# Altium PCB Badge.PcbDoc
Units mil, origin at the board's own origin, x right, y up, seen from the top; angles counter-clockwise.
Board outline 2068 x 3859.51 mil, 2 copper layers (Top Layer, Bottom Layer); 47 components, 61 nets, 170 pads, 40 vias.
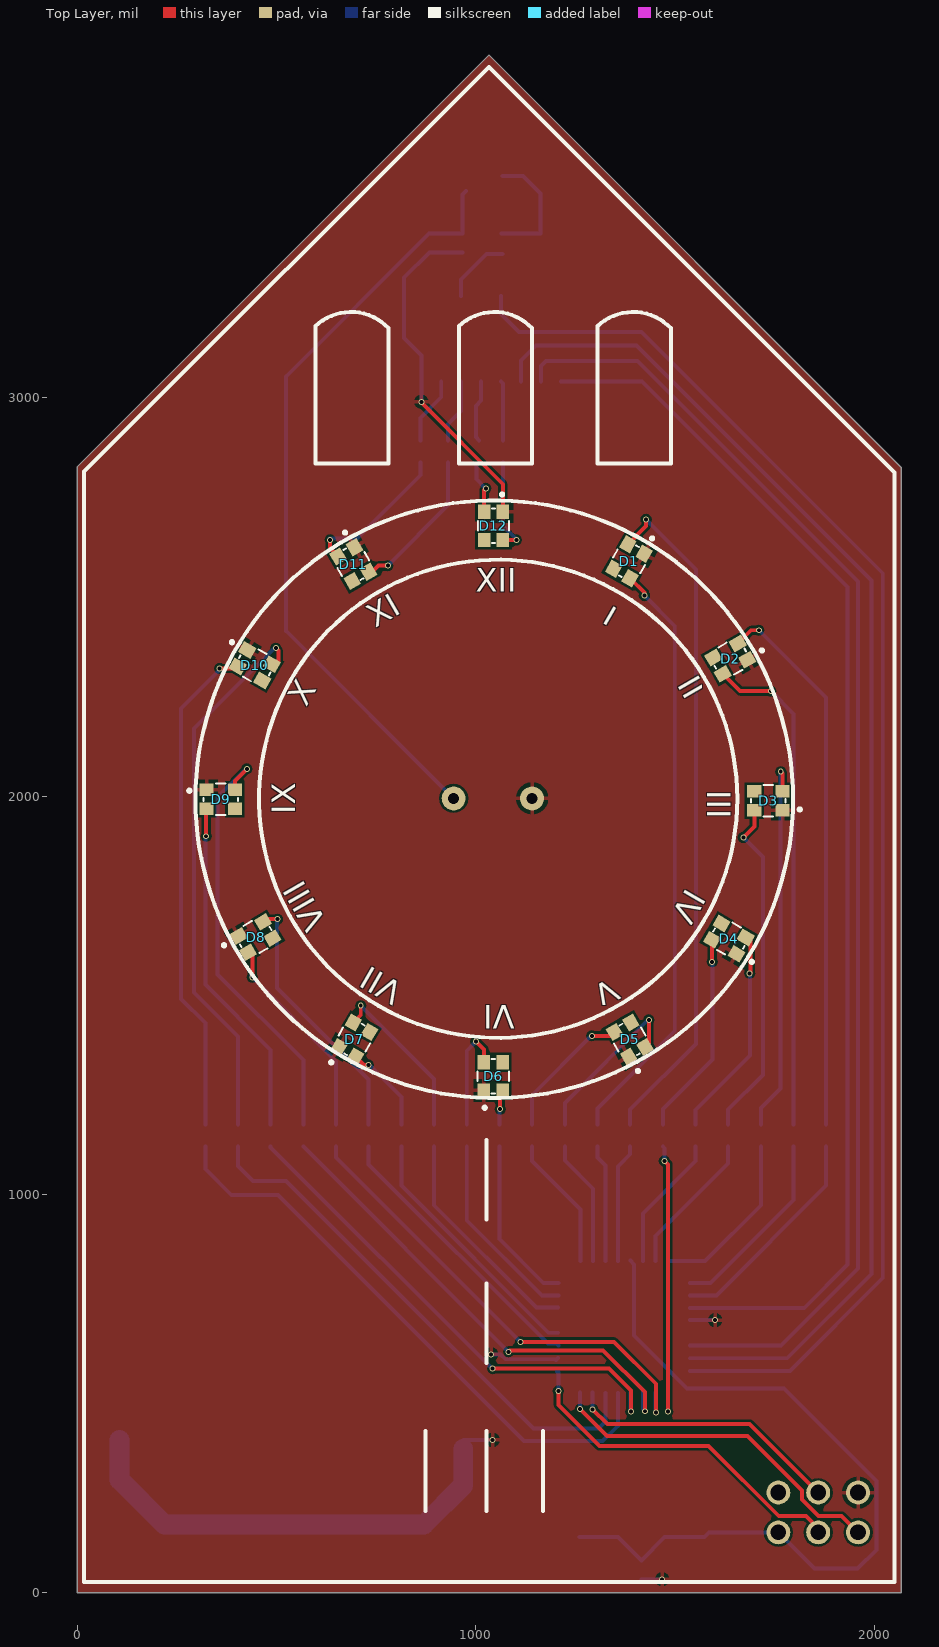
[diagram p0: Top Layer view]
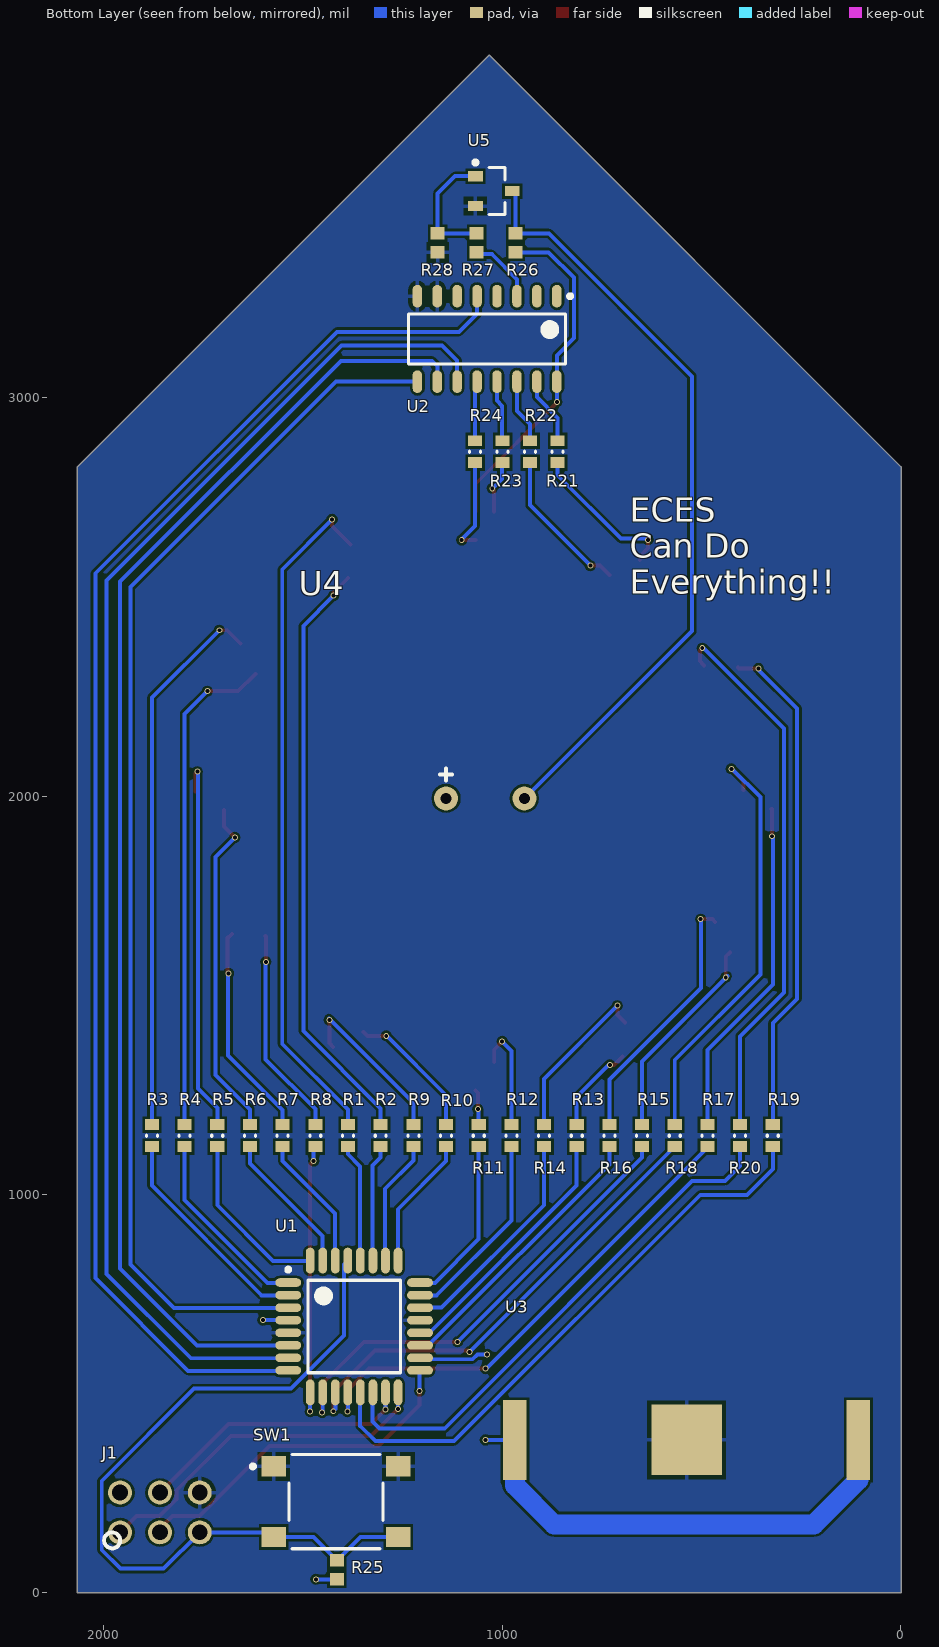
[diagram p1: Bottom Layer view, seen from below]

## Layer stack, top to bottom
Top Solder: solder mask 0.4, Solder Resist, Dk 3.5
Top Layer: signal copper 1.4
Dielectric 1: dielectric 12.6, FR-4, Dk 4.8
Bottom Layer: signal copper 1.4
Bottom Solder: solder mask 0.4, Solder Resist, Dk 3.5

## Board outline
-1,0 -1,2826.02 1032.49,3859.51 2067,2825 2067,0

## Design rules (kind name [scope] priority, off if disabled: settings)
Clearance [All] p1: gap=6 ignorepadtopadclearanceinfootprint=FALSE except(0: Arc-Text Arc-Hole Track-Text Track-Hole SMDPad-Text SMDPad-Hole THPad-Text THPad-Hole Via-Text Via-Hole Fill-Text Fill-Hole Poly-Text Poly-Hole Region-Text Region-Hole Text-Text Text-Hole)
MinimumSolderMaskSliver [All] p1: minsoldermaskwidth=4
PolygonConnect [All] p1: connectstyle=Relief reliefconductorwidth=10 reliefentries=4 polygonreliefangle="90 Angle" airgapwidth=10
RoutingVias [All] p1: holewidth=28 width=50 viastyle="Through Hole" minholewidth=28 minwidth=50 maxholewidth=28 maxwidth=50
SilkToSilkClearance [All] p1: silktosilkclearance=0
SilkToSolderMaskClearance [IsPad] p1: minsilkscreentomaskgap=0 clearancetoexposedcopper=TRUE
SolderMaskExpansion [All] p1: expansion=2
Width [All] p1: maxlimit=100 minlimit=10 preferedwidth=10
27 further rules are at their usual default settings.

## Components (designator, comment, footprint, x,y, rotation, side; value= is the part's Value field where it differs from the comment)
D1 "White LED" *LED_ASMB-KTF0-0A306 1384,2589 r240 top
D2 "White LED" *LED_ASMB-KTF0-0A306 1638.5,2344.74 r210 top
D3 "White LED" *LED_ASMB-KTF0-0A306 1734,1988 r180 top
D4 "White LED" *LED_ASMB-KTF0-0A306 1635,1642 r150 top
D5 "White LED" *LED_ASMB-KTF0-0A306 1386,1389 r120 top
D6 "White LED" *LED_ASMB-KTF0-0A306 1043.62,1296.43 r90 top
D7 "White LED" *LED_ASMB-KTF0-0A306 695,1389 r60 top
D8 "White LED" *LED_ASMB-KTF0-0A306 447,1646 r30 top
D9 "White LED" *LED_ASMB-KTF0-0A306 359.57,1991.62 r0 top
D10 "White LED" *LED_ASMB-KTF0-0A306 445,2328 r330 top
D11 "White LED" *LED_ASMB-KTF0-0A306 692.26,2582 r300 top
D12 "White LED" *LED_ASMB-KTF0-0A306 1044,2678 r270 top
J1 "ICSP Header" "programmer header" 1859,202 r90 bottom
R1 "603" RESC0603(1608)_L 1387,1147.56 r90 bottom value="330.00 Ohm"
R2 "603" RESC0603(1608)_L 1305,1147.56 r90 bottom value="330.00 Ohm"
R3 "603" RESC0603(1608)_L 1879,1147.56 r90 bottom value="330.00 Ohm"
R4 "603" RESC0603(1608)_L 1797,1147.56 r90 bottom value="330.00 Ohm"
R5 "603" RESC0603(1608)_L 1715,1147.56 r90 bottom value="330.00 Ohm"
R6 "603" RESC0603(1608)_L 1633,1147.56 r90 bottom value="330.00 Ohm"
R7 "603" RESC0603(1608)_L 1551,1147.56 r90 bottom value="330.00 Ohm"
R8 "603" RESC0603(1608)_L 1469,1147.56 r90 bottom value="330.00 Ohm"
R9 "603" RESC0603(1608)_L 1223,1147.56 r90 bottom value="330.00 Ohm"
R10 "603" RESC0603(1608)_L 1141,1147.56 r90 bottom value="330.00 Ohm"
R11 "603" RESC0603(1608)_L 1059,1147.56 r90 bottom value="330.00 Ohm"
R12 "603" RESC0603(1608)_L 977,1147.56 r90 bottom value="330.00 Ohm"
R13 "603" RESC0603(1608)_L 813,1147.56 r90 bottom value="330.00 Ohm"
R14 "603" RESC0603(1608)_L 895,1147.56 r90 bottom value="330.00 Ohm"
R15 "603" RESC0603(1608)_L 649,1147.56 r90 bottom value="330.00 Ohm"
R16 "603" RESC0603(1608)_L 731,1147.56 r90 bottom value="330.00 Ohm"
R17 "603" RESC0603(1608)_L 485,1147.56 r90 bottom value="330.00 Ohm"
R18 "603" RESC0603(1608)_L 567,1147.56 r90 bottom value="330.00 Ohm"
R19 "603" RESC0603(1608)_L 321,1147.56 r90 bottom value="330.00 Ohm"
R20 "603" RESC0603(1608)_L 403,1147.56 r90 bottom value="330.00 Ohm"
R21 "603" RESC0603(1608)_L 861,2864 r270 bottom value="330.00 Ohm"
R22 "603" RESC0603(1608)_L 930,2864 r270 bottom value="330.00 Ohm"
R23 "603" RESC0603(1608)_L 999,2864 r270 bottom value="330.00 Ohm"
R24 "603" RESC0603(1608)_L 1068,2864 r270 bottom value="330.00 Ohm"
R25 "603" RESC1608X50X30LL20T20 1415,58 r270 bottom
R26 "603" RESC1608X50X30LL20T20 966.59,3388.13 r90 bottom
R27 "603" RESC1608X50X30LL20T20 1064.3,3388.13 r270 bottom
R28 "603" RESC1608X50X30LL20T20 1162,3388.13 r270 bottom
SW1 "SW" CKCP-PTS645S_V 1417,229 r180 bottom
U1 "ATtiny48-AUR" 32A_N 1371.65,668.75 r180 bottom
U2 "Multiplexer 3:8" Multiplexer 1038,3147 r270 bottom
U3 "Coin Cell" Batt 537.1,384 r180 bottom
U4 "Piezo" Piezo 1141,1994 r180 bottom
U5 "N-Type Mosfet" 2N7002K-7 1021,3518 r180 bottom

## Footprints (in the part's own frame and the unit in brackets; to place one, negate y for a bottom-side part, rotate by r counter-clockwise, add the part's x,y. Pads: shape width x height; smd on the part's side, far side on the other; paste and mask are expansions set on the pad)
2N7002K-7 [mm] "SOT23, 3-Leads, Body 2.90x2.40mm, Pitch 0.95mm, IPC Medium Density"
  rect 0.95x0.65 smd: D(1.175,0) G(-1.175,0.95) S(-1.175,-0.95)
  silkscreen extent -1.3,-1.5 0.7,1.95, body extent -1.25,-1.5 1.25,1.5, height 1.1
32A_N [mm] "Thin QFP, 32-Leads, Body 7x7mm, Pitch 0.8mm, IPC Medium Density"
  oval 1.65x0.55 smd: 1(-4.2,2.8) 2(-4.2,2) 3(-4.2,1.2) 4(-4.2,0.4) 5(-4.2,-0.4) 6(-4.2,-1.2) 7(-4.2,-2) 8(-4.2,-2.8) 17(4.2,-2.8) 18(4.2,-2) 19(4.2,-1.2) 20(4.2,-0.4) 21(4.2,0.4) 22(4.2,1.2) 23(4.2,2) 24(4.2,2.8)
  oval 0.55x1.65 smd: 9(-2.8,-4.2) 10(-2,-4.2) 11(-1.2,-4.2) 12(-0.4,-4.2) 13(0.4,-4.2) 14(1.2,-4.2) 15(2,-4.2) 16(2.8,-4.2) 25(2.8,4.2) 26(2,4.2) 27(1.2,4.2) 28(0.4,4.2) 29(-0.4,4.2) 30(-1.2,4.2) 31(-2,4.2) 32(-2.8,4.2)
  silkscreen extent -4.33,-2.95 2.95,3.75, body extent -3.5,-3.5 3.5,3.5, height 1.2
*LED_ASMB-KTF0-0A306 [mm]
  rect 0.9x0.8 smd: 1(-0.9,0.6) 2(-0.9,-0.6) 3(0.9,-0.6) 4(0.9,0.6)
  silkscreen extent -2.1,-1 1.1,1
Batt [mm] "Coin Cell"
  rect 4.5x4.5 smd: GND(0,0)
  rect 1.5x5.1 smd: VDD(-10.95,0) VDD(10.95,0)
  body extent -11.81,-7.75 11.81,7.37, height 0.25
CKCP-PTS645S_V [mm] "THD, 4-Leads, Body 6x6mm, Pitch 4.5mm"
  rect 1.55x1.3 smd: 1(-3.975,2.25) 2(3.975,2.25) 3(-3.975,-2.25) 4(3.975,-2.25)
  silkscreen extent -5.43,-3 3,3, body extent -4.5,-3 4.5,3, height 4.3
Multiplexer [mm] "SOP, 16-Leads, Body 9.90x3.90mm, Pitch 1.27mm, IPC Medium Density"
  oval 1.45x0.6 smd: 1(-2.725,4.445) 2(-2.725,3.175) 3(-2.725,1.905) 4(-2.725,0.635) 5(-2.725,-0.635) 6(-2.725,-1.905) 7(-2.725,-3.175) 8(-2.725,-4.445) 9(2.725,-4.445) 10(2.725,-3.175) 11(2.725,-1.905) 12(2.725,-0.635) 13(2.725,0.635) 14(2.725,1.905) 15(2.725,3.175) 16(2.725,4.445)
  silkscreen extent -2.85,-5 1.6,5.42, body extent -3,-5 3,5, height 1.75
Piezo [mil]
  round 60 hole 27.56: 1(0,0) 2(196.85,0)
  silkscreen extent -15,45 15,75, body extent -380,-480 580,480, height 256
"programmer header" [mil]
  round 60 hole 39.37: 1(-50,100) 2(50,100) 3(-50,0) 4(50,0) 5(-50,-100) 6(50,-100)
  silkscreen extent -90,100 -50,140, body extent -100,-150 100,150, height 330
RESC0603(1608)_L [mm] "Chip Resistor, Body 1.6x0.8mm, IPC High Density"
  rect 0.7x0.9 smd: 1(-0.7,0) 2(0.7,0)
  silkscreen extent -0.05,-0.35 0.05,0.35, body extent -0.85,-0.47 0.85,0.47, height 0.6
RESC1608X50X30LL20T20 [mm] "Chip Resistor, 2-Leads, Body 1.60x0.80mm, IPC High Density"
  rect 0.8x0.9 smd: 1(-0.6,0) 2(0.6,0)
  body extent -0.9,-0.5 0.9,0.5, height 0.5

## Part data
D1 D2 D3 D4 D5 D6 D7 D8 D9 D10 D11 D12: library part ASMB-KTF0-0A306, "2220 Tricolor PLCC4 Surface Mount LED", Package="PLCC-4 Broadcom", Digi-Key_Part_Number=516-3906-1-ND, Digi-Key_Purchase_URL=https://www.digikey.com/product-detail/en/broadcom-limited/ASMB-KTF0-0A306/516-3906-1-ND/7917025?utm_source=snapeda&utm_medium=aggregator&utm_campaign=symbol, MF="Broadcom Limited", MP=ASMB-KTF0-0A306, SnapEDA_Link=https://www.snapeda.com/parts/ASMB-KTF0-0A306/Broadcom%20Limited/view-part/?ref=snap
R1 R2 R3 R4 R5 R6 R7 R8 R9 R10 R11 R12 R13 R14 R15 R16 R17 R18 R19 R20 R21 R22 R23 R24: library part CMP-1012-00062-1, "330R 0.1W 5% 0603 (1608 Metric)  SMD", Case-EIA=0603, Case-Metric=1608, Manufacturer=Susumu, MPN=RR0816P-331-D, Power="0.1 W", Tolerance="5 %", Technology=SMT
R25 R26 R27 R28: library part CMP-2000-02424-1, Manufacturer=Susumu, MPN=RR0816P-103-D
SW1: library part CMP-2000-07594-1, "Tact Switch, SPST-NO, 50 mA, -20 to 60 degC, 4-Pin SMD, RoHS, Tape and Reel", Case\/Package=SMD/SMT, Colour=Black, Contact Resistance=100mOhm, Current Rating=50mA, Manufacturer="C&K Components", Max Operating Temperature=60degC, Max Voltage Rating (DC)=12V, Min Operating Temperature=-20degC, MPN=PTS645S, Operating Force=160gf, Package Description="4-Pin Surface Mount Device, Body 6 x 6 mm, Pitch 4.5 mm", Package Quantity=1000, Actuator Length=0.85mm, Actuator Material=Polyamide, Contact Material=Silver, Contact Plating=Silver, Datasheet URL=http://www.ckswitches.com/media/1471/pts645.pdf, Datasheet Version=04/2016, Depth=9mm, Illumination Type=Illuminated, Lead Free=LeadFree, Length=6mm, Manufacturer URL=http://www.ckswitches.com/, Max Current Rating=50mA, Mechanical Life=100000Cycles, Mount=SurfaceMount, Mounting Technology=SurfaceMount, Orientation=Straight, Packaging=TapeandReel, REACH SVHC=NoSVHC, RoHSCompliant=True, Switch Function=Off-Mom, Termination=GullWing, Throw Configuration=SPST, Voltage Rating (DC)=12V
U1: library part CMP-0093-00123-1, "8-bit AVR Microcontroller, 1.8-5.5V, 4KB Flash, 64 Bytes EEPROM, 256 Bytes SRAM, 32-pin TQFP, Industrial Grade (-40°C to 85°C), Pb-Free, Reel", Code_JEDEC=MS-026-ABA, DatasheetVersion="revC, Mar-2009", PackageDescription="32-Lead, 7x7x1.0 mm Body, 0.8mm Lead Pitch, Thin Profile Plastic Quad Flat Package (TQFP)", PackageReference=32A, PackageVersion="revB, Oct-2001"
U2: library part Multiplexer, "IC LV FET MUX/DEMUX 16-TSSOP", Manufacturer=TI, MPN=SN74CBTLV3251PWR
U3: library part Batt, "Battery Retainer Coin, 20.0mm 1 Cell SMD (SMT) Tab", Manufacturer="Keystone Electronics", MPN=3034TR
U4: "AUDIO PIEZO TRANSDUCER 30V TH", Manufacturer="TDK Corporation", MPN=PS1240P02BT
U5: library part 2N7002K-7, "N-Channel 800V 1A (Tc) 45W (Tc) Surface Mount D-Pak", Manufacturer="Diodes Incorporated", MPN=2N7002K-7

## Via types
v1: diameter 15, hole 10, Top Layer to Bottom Layer, tented both sides, 40 vias

## Nets (pads, with @x,y where several pads share a name; then routed paths per layer and width w, separated by ;. In a path a pad name is that pad's centre, name@x,y a point inside that pad or via, vN(x,y) a via of type N, cw(c..) or ccw(c..) an arc to the next point about the centre after c; other vN are vias at no path point)
A: U1.8 U2.5 | length 3620.5
  Bottom Layer w10: U2.5 1063,3210 1108,3165 1415,3165 2021,2559 2021,790 1788.52,557.52 U1.8@1537.71,557.52
GND: J1.6 R28.2 SW1.1 SW1.2 U1.5 U1.21 U2.7 U2.8 U3.GND U5.S
LED1_B: R2.1 U1.27 | length 295.2
  Bottom Layer w10: R2.1 1305,1093 1325.11,1072.89 U1.27@1325.11,833.11
LED1_R: R1.1 U1.28 | length 299.5
  Bottom Layer w10: U1.28@1356.61,833.11 1356.61,1070.61 1387,1101 R1.1
LED2_B: R4.1 U1.1 | length 479.5
  Bottom Layer w10: U1.1@1537.71,777.99 1588.99,777.99 1797,986 R4.1
LED2_R: R3.1 U1.2 | length 553.4
  Bottom Layer w10: U1.2@1537.71,746.5 1603.5,746.5 1879,1022 R3.1
LED3_B: R6.1 U1.31 | length 362.2
  Bottom Layer w10: U1.31@1451.09,833.11 1451.09,896.09 1633,1078 R6.1
LED3_R: R5.1 U1.32 | length 437.4
  Bottom Layer w10: U1.32@1482.59,833.11 1575.11,833.11 1715,973 R5.1
LED4_B: R8.1 U1.9 | length 718.5
  Top Layer w10: v1(1473,1084) 1481.88,1075.12 v1(1481.88,455.12)
  Bottom Layer w10: R8.1 1473,1116 v1(1473,1084) ; v1(1481.88,455.12) U1.9
LED4_R: R7.1 U1.30 | length 341.3
  Bottom Layer w10: U1.30@1419.6,833.11 1419.6,952.6 1551,1084 R7.1
LED5_B: R10.1 U1.25 | length 337.1
  Bottom Layer w10: R10.1 1141,1084 1262.12,962.88 U1.25@1262.12,833.11
LED5_R: R9.1 U1.26 | length 316.1
  Bottom Layer w10: R9.1 1223,1085 1293.61,1014.39 U1.26@1293.61,833.11
LED6_B: R12.1 U1.23 | length 493.1
  Bottom Layer w10: R12.1 977,935 1165.5,746.5 U1.23@1207,746.5
LED6_R: R11.1 U1.24 | length 425.6
  Bottom Layer w10: R11.1 1059,888 1169.01,777.99 U1.24@1207,777.99
LED7_B: R14.1 U1.22 | length 564.7
  Bottom Layer w10: R14.1 895,973 1152.01,715.99 U1.22
LED7_R: R13.1 U1.20 | length 644.1
  Bottom Layer w10: R13.1 813,1022 1182,653 U1.20
LED8_B: R16.1 U1.19 | length 709
  Bottom Layer w10: R16.1 731,1075.49 1180.99,625.5 1202.02,625.5 U1.19@1207,620.51
LED8_R: R15.1 U1.10 | length 1188.3
  Top Layer w10: v1(1112,630) 1347,630 1452,525 v1(1452,453)
  Bottom Layer w10: R15.1 649,1093 v1(1112,630) ; U1.10 1450.39,454.61 v1(1452,453)
LED9_B: R18.1 U1.11 | length 1212.6
  Top Layer w10: v1(1082,605) 1085.51,608.51 1319.49,608.51 1424,504 v1(1424,456)
  Bottom Layer w10: R18.1 v1(1082,605) ; U1.11 1418.89,461.11 v1(1424,456)
LED9_R: R17.1 U1.12 | length 1260.4
  Top Layer w10: v1(1042,563) 1334,563 1388.74,508.26 v1(1388.74,455.12)
  Bottom Layer w10: R17.1 485,1117.84 1039.84,563 v1(1042,563) ; U1.12 1387.39,456.47 v1(1388.74,455.12)
LED10_B: R20.1 U1.14 | length 1322.5
  Bottom Layer w10: R20.1 403,1072 441,1034 523.22,1034 1144.22,413 1308,413 1325.11,430.11 U1.14@1325.11,502.4
LED10_R: R19.1 U1.13 | length 1473.3
  Bottom Layer w10: R19.1 321,1064 386,999 503,999 1121,381 1318,381 1356.61,419.61 U1.13@1356.61,502.4
LED11_B: R22.1 U2.14 | length 161.8
  Bottom Layer w10: R22.1 930,2933 963,2966 U2.14
LED11_R: R21.1 U2.15 | length 169.7
  Bottom Layer w10: R21.1 861,2949 913,3001 U2.15
LED12_B: R24.1 U2.12 | length 150.2
  Bottom Layer w10: U2.12 1068,3034.72 R24.1
LED12_R: R23.1 U2.13 | length 155.9
  Bottom Layer w10: R23.1@1008,2892.56 1000,2900.56 1000,2979 1013,2992 U2.13
MISO: J1.1 U1.16 | length 880.6
  Top Layer w10: v1(1261.41,461.41) 1328.82,394 1681,394 1818,257 1818,235.02 1860.02,193 1918,193 J1.1
  Bottom Layer w10: v1(1261.41,461.41) U1.16
MOSI: J1.4 U1.15 | length 695.1
  Top Layer w10: v1(1292.91,460.91) 1329.81,424 1687,424 J1.4
  Bottom Layer w10: v1(1292.91,460.91) U1.15
NetD1_2: D1.2 R1.2 | length 1720.5
  Top Layer w10: D1.2 1427,2677.24 v1(1427,2694)
  Bottom Layer w10: R1.2 1387,1213 1552,1378 1552,2569 v1(1427,2694)
NetD1_4: D1.4 R2.2 | length 1498.2
  Top Layer w10: D1.4 1423,2510.24 v1(1423,2503)
  Bottom Layer w10: R2.2 1305,1216 1499,1410 1499,2427 v1(1423,2503)
NetD2_2: D2.2 R3.2 | length 1377.2
  Top Layer w10: D2.2 1690.46,2416 v1(1710,2416)
  Bottom Layer w10: v1(1710,2416) 1879,2247 R3.2
NetD2_4: D2.4 R4.2 | length 1249.9
  Top Layer w10: D2.4 1663.19,2263 v1(1740,2263)
  Bottom Layer w10: v1(1740,2263) 1797,2206 R4.2
NetD3_2: D3.2 R5.2 | length 956.4
  Top Layer w10: v1(1765,2061) 1769.43,2056.57 D3.2
  Bottom Layer w10: R5.2 1715,1217 1764,1266 v1@1764,2060
NetD3_4: D3.4 R6.2 | length 857
  Top Layer w10: v1(1671,1896) 1698.57,1923.57 D3.4
  Bottom Layer w10: R6.2 1633,1213 1720,1300 1720,1847 v1(1671,1896)
NetD4_2: D4.2 R7.2 | length 541.9
  Top Layer w10: D4.2@1678.5,1653.74 1687,1645.24 1689.09,1645.24 1689.09,1557.09 v1(1687,1555)
  Bottom Layer w10: R7.2 1551,1212 1688,1349 v1@1688,1555
NetD4_4: D4.4 R8.2 | length 521.1
  Top Layer w10: v1(1593,1584) 1593,1647.76 D4.4@1593.5,1648.26
  Bottom Layer w10: R8.2 1469,1214 1594,1339 v1@1594,1580
NetD5_2: D5.2 R9.2 | length 426.6
  Top Layer w10: D5.2 1434,1379.95 v1(1434,1438)
  Bottom Layer w10: R9.2 1223,1230 v1@1435,1442
NetD5_4: D5.4 R10.2 | length 342.7
  Top Layer w10: v1(1291,1398) 1337.95,1398 D5.4
  Bottom Layer w10: R10.2 1141,1249 v1@1288,1396
NetD6_2: D6.2 R11.2 | length 87.5
  Top Layer w10: v1(1061,1214) 1061,1254.76 D6.2
  Bottom Layer w10: R11.2 v1@1059,1213
NetD6_4: D6.4 R12.2 | length 275
  Top Layer w10: v1(1000,1384) 1020,1364 D6.4
  Bottom Layer w10: R12.2 977,1360 v1@998,1381
NetD7_2: D7.2 R13.2 | length 227
  Top Layer w10: D7.2 719.24,1325 v1(730,1325)
  Bottom Layer w10: v1@731,1327 813,1245 R13.2
NetD7_4: D7.4 R14.2 | length 422.5
  Top Layer w10: D7.4 711,1450.24 v1(711,1474)
  Bottom Layer w10: v1@713,1472 895,1290 R14.2
NetD8_2: D8.2 R15.2 | length 528.9
  Top Layer w10: D8.2 439,1596.95 v1(439,1545)
  Bottom Layer w10: v1@435,1548 649,1334 R15.2
NetD8_4: D8.4 R16.2 | length 649.1
  Top Layer w10: D8.4 472.7,1691 v1(502,1691)
  Bottom Layer w10: v1@501,1690 501,1518 731,1288 R16.2
NetD9_2: D9.2 R17.2 | length 856.3
  Top Layer w10: v1(323,1899) 323,1966.87 D9.2
  Bottom Layer w10: v1@321,1894 321,1527 485,1363 R17.2
NetD9_4: D9.4 R18.2 | length 1075.1
  Top Layer w10: D9.4 395,2038 v1(425,2068)
  Bottom Layer w10: v1@422,2067 352,1997 352,1552 567,1337 R18.2
NetD10_2: D10.2 R19.2 | length 1255.5
  Top Layer w10: v1(357,2320) 406.24,2320 D10.2@408.5,2322.26
  Bottom Layer w10: R19.2 321,1430 260,1491 260,2220 v1@354,2314
NetD10_4: D10.4 R20.2 | length 1376.2
  Top Layer w10: D10.4@493.5,2327.74 504,2338.24 504,2365 v1(498,2371)
  Bottom Layer w10: R20.2 403,1397 293,1507 293,2170 v1@495,2372
NetD11_2: D11.2 R21.2 | length 386.1
  Top Layer w10: v1(634,2643) 634,2622.5 654.83,2601.67 D11.2@654.83,2591.88
  Bottom Layer w10: v1@632,2646 702,2646 861,2805 R21.2
NetD11_4: D11.4 R22.2 | length 377.7
  Top Layer w10: D11.4@731.17,2554.12 755.05,2578 v1(779,2578)
  Bottom Layer w10: v1@779,2579 930,2730 R22.2
NetD12_2: D12.2 R23.2 | length 136.9
  Top Layer w10: D12.2 1020.38,2767.38 v1(1025,2772)
  Bottom Layer w10: R23.2@1008,2837.44 1001,2830.44 1001,2795 v1@1023,2773
NetD12_4: D12.4 R24.2 | length 237.6
  Top Layer w10: D12.4 v1(1101.57,2642.57)
  Bottom Layer w10: R24.2 1068,2678 v1@1100,2646
NetR26_2: R26.2 U4.2 U5.D | length 1933.8
  Bottom Layer w10: U4.2 524,2414.15 524,3053 882.76,3411.76 R26.2 966.59,3509.85 U5.D
NetR27_1: R27.1 R28.1 U5.G | length 310.7
  Bottom Layer w10: R27.1 R28.1 1162,3512 1118.6,3555.4 U5.G
Piezo: R27.2 U2.3 | length 172.3
  Bottom Layer w10: U2.3 963,3296.41 1026.22,3359.63 R27.2@1066.94,3359.63
PP_CC: D1.1 D2.1 D3.1 D4.1 D5.1 D6.1 D7.1 D8.1 D9.1 D10.1 D11.1 D12.1 J1.2 R25.2 R26.1 U1.4 U1.18 U2.16 U3.VDD U4.1 | length 2391.9
  Top Layer w10: v1(863,2989) 863,2987 1067.62,2782.38 D12.1
  Bottom Layer w10: v1(863,2989) U2.16 863,3106 820,3149 820,3301 883.51,3364.51 R26.1 ; U3.VDD@968.2,361.06 968.2,384 v1(1042,384) ; v1(1038,599) 1061.84,599 1074.34,586.5 1199.78,586.5 1201.28,585 U1.18 ; R25.2 v1(1467.38,34.38) ; U1.4 v1(1600.5,684.5)
  Bottom Layer w50: U3.VDD@106,384 106,284 218,172 870,172 968.2,270.2 U3.VDD@968.2,361.06
RESET: J1.5 R25.1 SW1.3 SW1.4 U1.29 | length 1979.4
  Bottom Layer w10: SW1.4 1356.2,140.42 R25.1 1473.8,140.42 SW1.3 1585.08,152 J1.5 1850,61 1958,61 2005,108 2005,281 1773,513 1529.99,513 1397.06,645.93 1397.06,824.43 U1.29
S0: U1.7 U2.11 | length 3476.5
  Bottom Layer w10: U2.11 1113,3093 1151,3131 1403,3131 1993,2541 1993,801 1781.02,589.02 U1.7@1537.71,589.02
S1: U1.6 U2.10 | length 3295.6
  Bottom Layer w10: U2.10 1163,3079 1176,3092 1405,3092 1959,2538 1959,814 1765.51,620.51 U1.6@1537.71,620.51
S2: U1.3 U2.9 | length 3074.1
  Bottom Layer w10: U2.9 1417.28,3039.72 1933,2524 1933,824 1824,715 U1.3@1537.71,715
SCK: J1.3 U1.17 | length 879.3
  Top Layer w10: v1(1207,507) 1207,472 1310,369 1584.02,369 1760.02,193 1828,193 1859,162 J1.3
  Bottom Layer w10: U1.17 1203.78,556 1207,552.78 v1(1207,507)
pads on no net: D1.3 D2.3 D3.3 D4.3 D5.3 D6.3 D7.3 D8.3 D9.3 D10.3 D11.3 D12.3 U2.1 U2.2 U2.4 U2.6

## Polygon pours and split planes (outlines as drawn)
GND on Bottom Layer "GND_L02_P000" (solid, remove dead copper, pour order 0): -1,0 -1,2826.02 1032.49,3859.51 2067,2825 2067,0
PP_CC on Top Layer "PP_CC_L01_P001" (solid, remove dead copper, pour order 1): -1,0 -1,2826.02 1032.49,3859.51 2067,2825 2067,0

## Silkscreen, mask and mechanical layers (free items; w line width, h text height)
Top Overlay:
  circle w10: c1056,1993 r600
  circle w10: c1046,1992 r750
  lines w10: 17,28 2051,28 2051,2812 1033,3830 17,2814 17,30 ; 597,3176 597,2835 781,2835 781,3171 ; 597,3179 cw(c686.5,3084.5) 781,3174 ; 873,206 873,406 ; 957,3176 957,2835 1141,2835 1141,3171 ; 957,3179 cw(c1046.5,3084.5) 1141,3174 ; 1026,206 1026,406 ; 1027,577 1027,777 ; 1027,937 1027,1137 ; 1168,206 1168,406 ; 1305,3176 1305,2835 1489,2835 1489,3171 ; 1305,3179 cw(c1394.5,3084.5) 1489,3174
  text "XII" at 1000,2492 h100
  text "I" at 1304,2420 h100 r330
  text "XI" at 758,2403 h100 r30
  text "II" at 1486,2269 h100 r300
  text "X" at 592,2212 h100 r60
  text "III" at 1561,2015 h100 r270
  text "IX" at 567,1954 h100 r90
  text "IV" at 1511,1781 h100 r240
  text "VIII" at 645,1693 h100 r120
  text "V" at 1327,1562 h100 r210
  text "VII" at 832,1541 h100 r150
  text "VI" at 1098,1495 h100 r180
Bottom Overlay:
  text "ECES / Can Do  / Everything!!" at 680,2508 h60
Mechanical 2:
  circle w10: c1045,1989 r750
  lines w10: -1,0 2067,0 2067,2825 1032.49,3859.51 -1,2826.02 -1,0